# Altium PCB controller.PcbDoc
Units mil, origin at the board's own origin, x right, y up, seen from the top; angles counter-clockwise.
Board outline 1968.5 x 1968.5 mil, 2 copper layers (Top Layer, Bottom Layer); 13 components, 17 nets, 70 pads, 8 vias.
Unrouted connection lines stored in the file: 1.
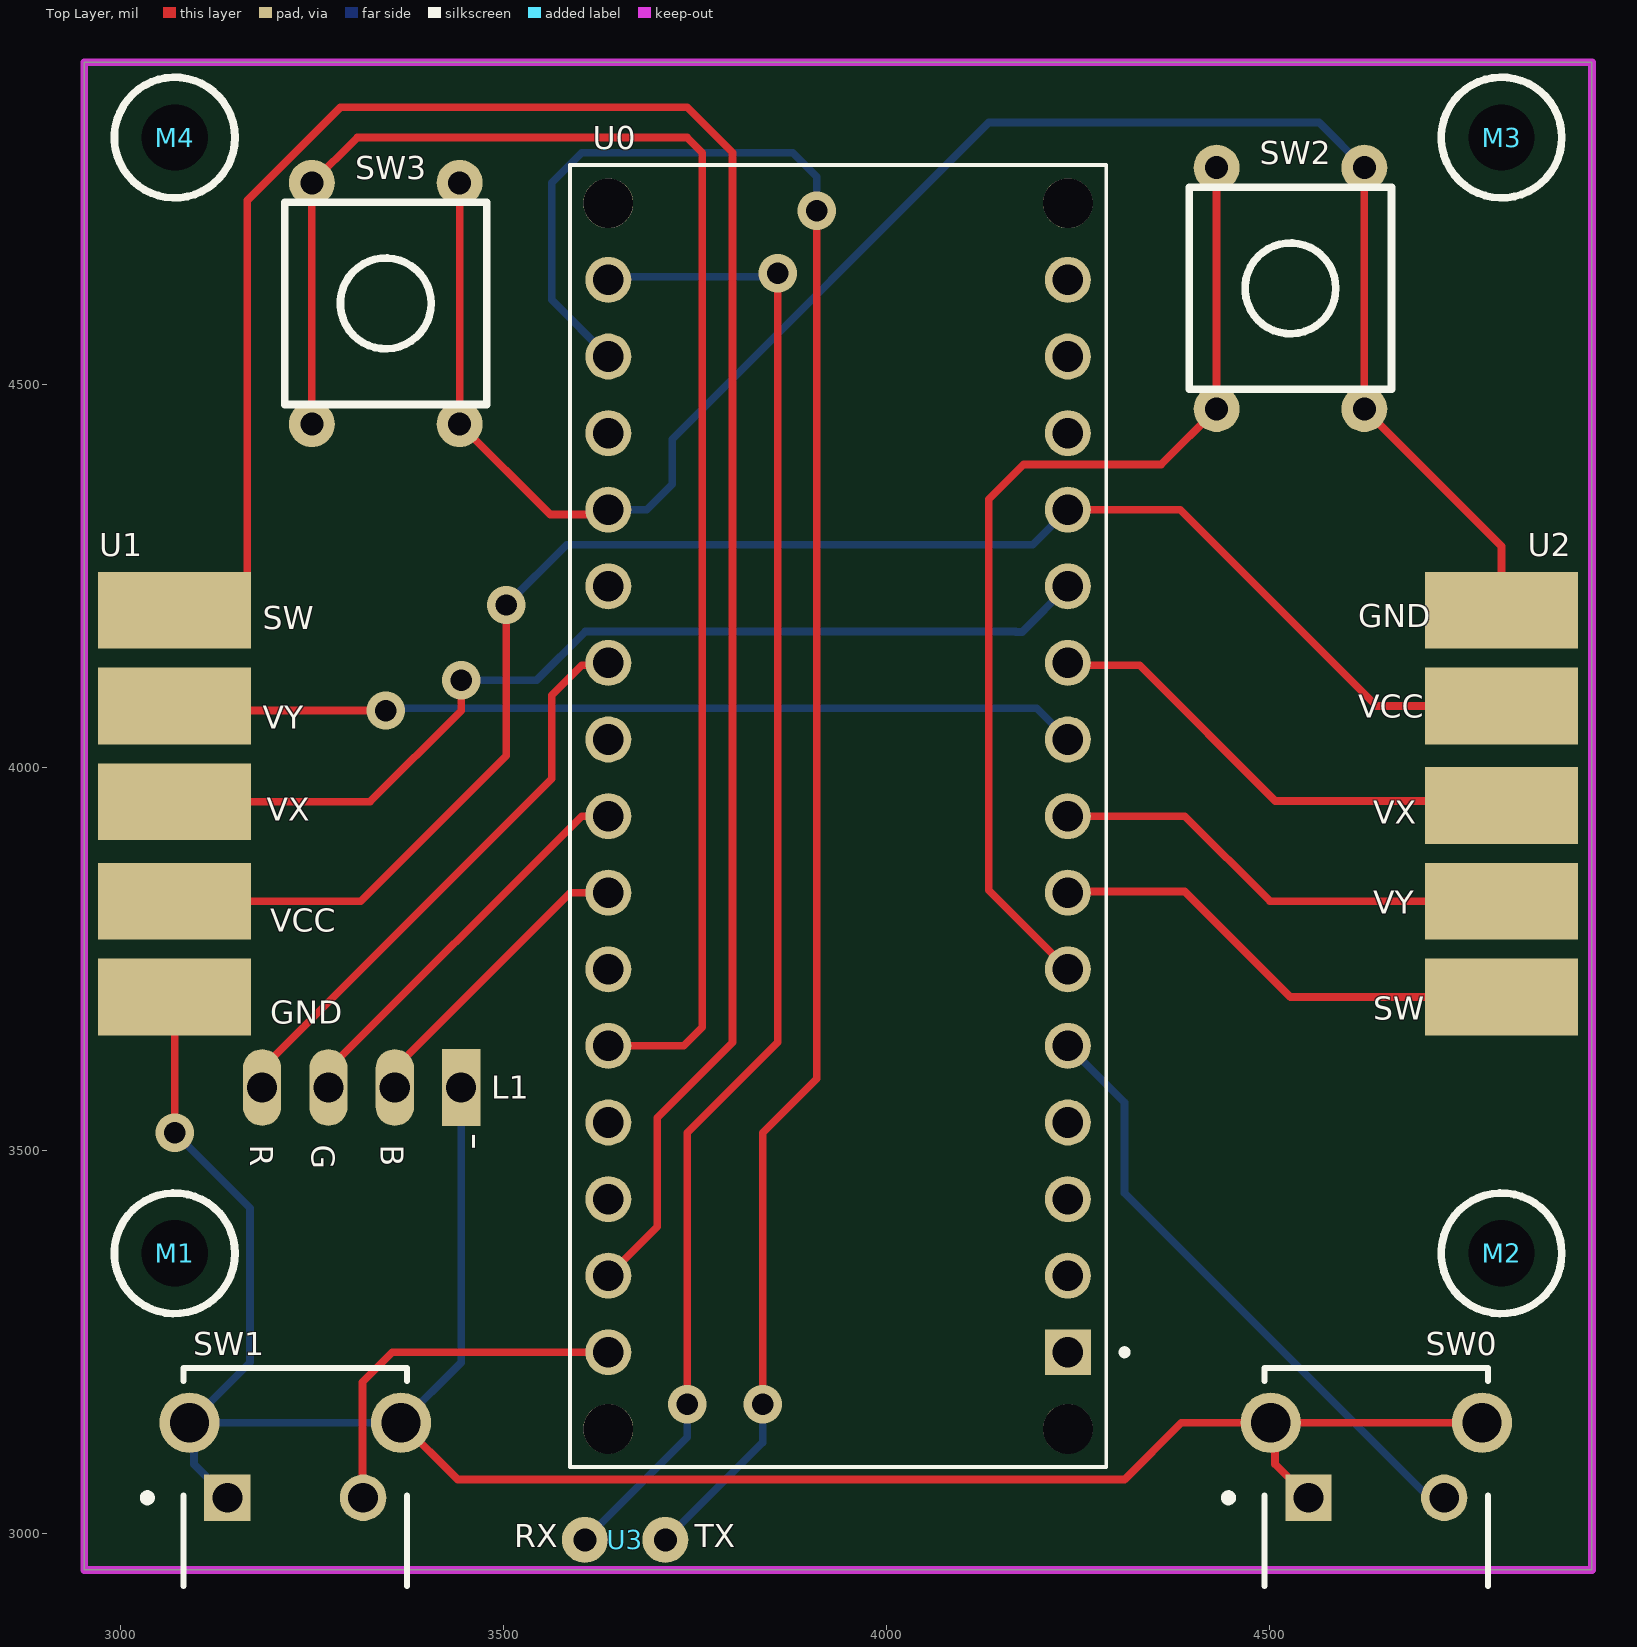
[diagram p0: Top Layer view]
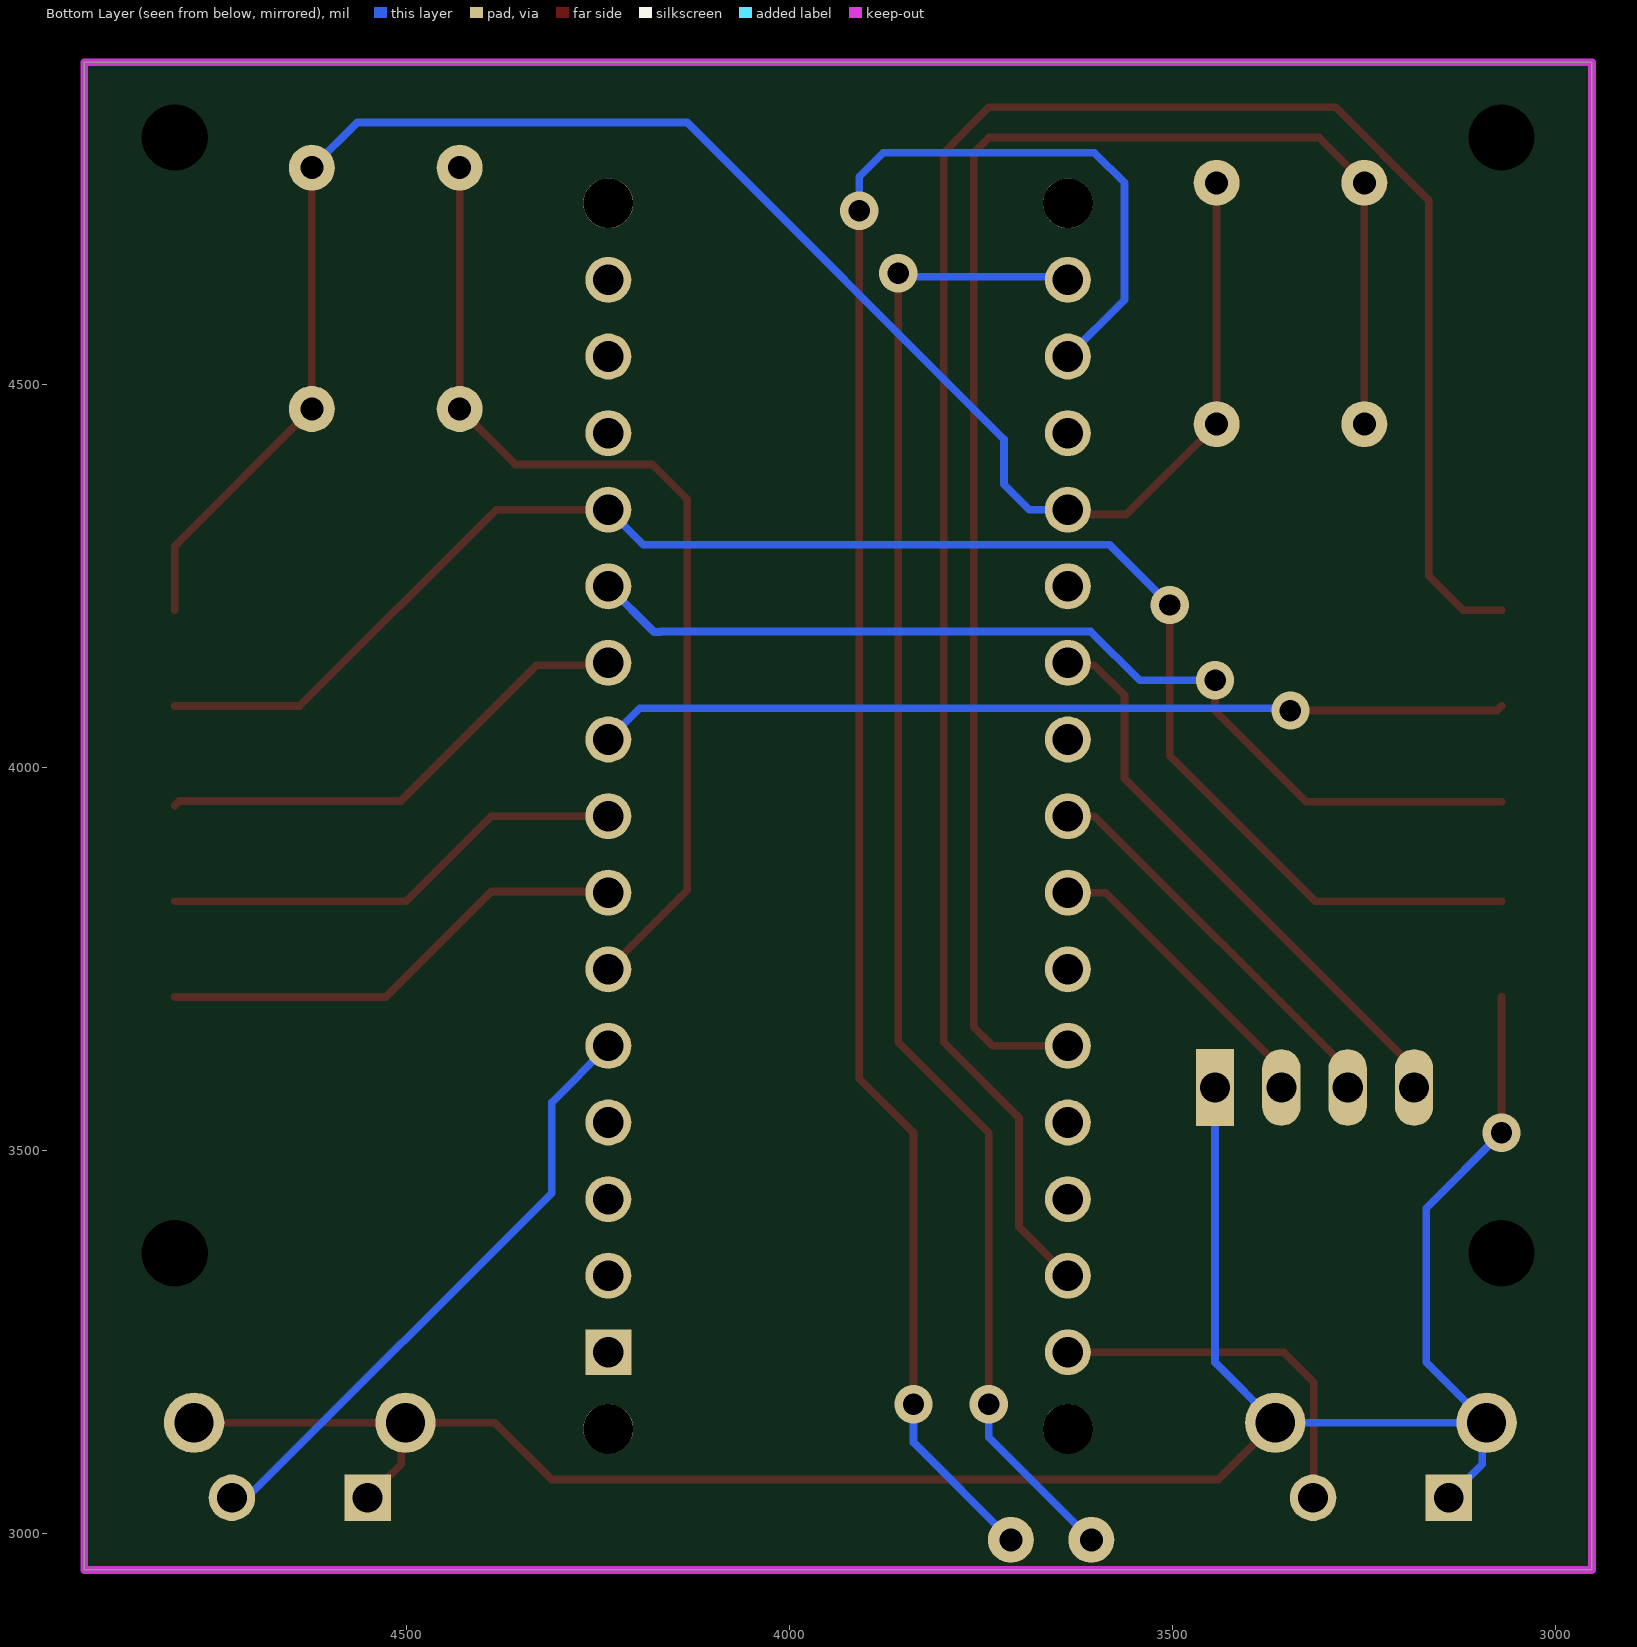
[diagram p1: Bottom Layer view, seen from below]

## Layer stack, top to bottom
Top Solder: solder mask 0.4, Solder Resist, Dk 3.5
Top Layer: signal copper 1.4
Dielectric 1: dielectric 12.6, FR-4, Dk 4.8
Bottom Layer: signal copper 1.4
Bottom Solder: solder mask 0.4, Solder Resist, Dk 3.5

## Board outline
2952.76,2952.76 2952.76,4921.26 4921.26,4921.26 4921.26,2952.76

## Design rules (kind name [scope] priority, off if disabled: settings)
Clearance Clearance_1 [All] p1: gap=5.91 ignorepadtopadclearanceinfootprint=FALSE
Clearance [All] p2: gap=10 ignorepadtopadclearanceinfootprint=FALSE ismatrix=TRUE
PolygonConnect [All] p1: connectstyle=Relief reliefconductorwidth=10 reliefentries=4 polygonreliefangle="90 Angle" airgapwidth=10
RoutingVias [All] p1: holewidth=28 width=50 viastyle="Through Hole" minholewidth=28 minwidth=50 maxholewidth=28 maxwidth=50
SolderMaskExpansion [All] p1: expansion=4 istentingtop=FALSE
Width [All] p1: maxlimit=10 minlimit=10 preferedwidth=10
30 further rules are at their usual default settings.

## Classes and differential pairs
component class controller: L1 M1 M2 M3 M4 SW0 SW1 SW2 U0 U1 U2 U3

## Components (designator, comment, footprint, x,y, rotation, side; value= is the part's Value field where it differs from the comment)
L1 "RGB_LED" RGB_LED 3444.88,3582.68 r270 top
M1 "mthnp2p2" mthnp2p2 3070.87,3366.14 r0 top
M2 "mthnp2p2" mthnp2p2 4803.15,3366.14 r0 top
M3 "mthnp2p2" mthnp2p2 4803.15,4822.84 r0 top
M4 "mthnp2p2" mthnp2p2 3070.87,4822.83 r0 top
SW0 "1825027-5" FP-1825027-5-0 4639.76,3050 r0 top
SW1 "1825027-5" FP-1825027-5-0 3228.35,3050 r0 top
SW2 "" DIP_BUTTON 4527.56,4625.98 r0 top
SW3 "" DIP_BUTTON 3346.46,4606.3 r0 top
U0 "ABX00028" MODULE_ABX00028 3937.01,3937.01 r90 top
U1 "joystick" joystick 2300.87,4000.79 r90 top
U2 "joystick" joystick 5573.15,3905.79 r270 top
U3 "" PCBComponent_1 3661.42,2992.13 r0 top

## Footprints (in the part's own frame and the unit in brackets; to place one, negate y for a bottom-side part, rotate by r counter-clockwise, add the part's x,y. Pads: shape width x height; smd on the part's side, far side on the other; paste and mask are expansions set on the pad)
DIP_BUTTON [mil]
  round 60 hole 30: 1(-96.46,-157.48) 1(-96.46,157.48) 2(96.46,-157.48) 2(96.46,157.48)
  silkscreen extent -132,-132 132,132
FP-1825027-5-0 [mm]
  rect 1.54x1.54 hole 0.99 paste-2539.97 mask+0: 1(-2.25,-0.075)
  round 1.54 hole 0.99 paste-2539.97 mask+0: 2(2.25,-0.075)
  round 2 hole 1.3 paste-2539.97 mask+0: 3(-3.505,2.415) 4(3.505,2.415)
  silkscreen extent -5.03,-3 3.71,4.23, body extent -4.2,-3.93 4.2,3.93, height 7.31
joystick [mil]
  rect 100x200 smd: 1(-300,-770) 2(-175,-770) 3(-45,-770) 4(80,-770) 5(205,-770)
MODULE_ABX00028 [mil]
  rect 60x60 / inner round 60 / far side rect 60x60 hole 40: 1(-700,-300)
  round 60 hole 40: 2(-600,-300) 3(-500,-300) 4(-400,-300) 5(-300,-300) 6(-200,-300) 7(-100,-300) 8(0,-300) 9(100,-300) 10(200,-300) 11(300,-300) 12(400,-300) 13(500,-300) 14(600,-300) 15(700,-300) 16(700,300) 17(600,300) 18(500,300) 19(400,300) 20(300,300) 21(200,300) 22(100,300) 23(0,300) 24(-100,300) 25(-200,300) 26(-300,300) 27(-400,300) 28(-500,300) 29(-600,300) 30(-700,300)
  round 65 hole 65 unplated: ""(-800,-300) ""(-800,300) ""(800,-300) ""(800,300)
  silkscreen extent -850,-378 850,350, body extent -895,-350 850,350, height 236
mthnp2p2 [mm]
  round 0 hole 2.2: 10(0,0)
  silkscreen extent -2,-2 2,2
PCBComponent_1 [mil]
  round 60 hole 30: 1(-55,0) 2(50,0)
RGB_LED [mm]
  oval 2.54x1.27 hole 1: 1(0,-6.6) 2(0,-4.4) 3(0,-2.2)
  rect 2.54x1.27 hole 1: 4(0,0)

## Part data
SW0 SW1: library part CMP-2000-05514-2, "SWITCH TACTILE SPST-NO 0.05A 24V", Contact Current Rating=50mA, Contact Resistance=100mΩ, Manufacturer="TE Connectivity", Operating Force=160gf, Temperature="-35°C to +85°C", Temperature Range High=+85°C, Temperature Range Low=-35°C, Voltage Rating Dc=24V, Automotive=No, Category=Switch, ComponentLink2Description=Datasheet, ComponentLink2URL=https://www.te.com/commerce/DocumentDelivery/DDEController?Action=showdoc&DocId=Customer+Drawing%7F1825027%7FG4%7Fpdf%7FEnglish%7FENG_CD_1825027_G4.pdf%7F1825027-5, Device Class L1=Electromechanical, Device Class L2=Switches, Device Class L3="Pushbutton Switches", Digikey Description="SWITCH TACTILE SPST-NO 0.05A 24V", Electromechanical Life=100000Cycles, Height=7.31mm, Lead Free=Yes, Manufacturer Part Number=1825027-5, Mount="Through Hole", Mouser Description="Tactile Switches R/A TACT 160G PB SWITCH", Octopart=https://octopart.com/1825027-5-te+connectivity-46510878, Package=1825027-5, RoHS=TRUE, Throw Configuration=SPST-NO
SW2 SW3: library part button
U0: "Arduinoâ€™s 5V compatible board in the smallest available form factor: 45x18mm!", Package=None, Availability="Not in stock", Check_prices=https://www.snapeda.com/parts/Arduino%20Nano%20Every/Arduino/view-part/?ref=eda, MF=Arduino, MP="Arduino Nano Every", Price=None, SnapEDA_Link=https://www.snapeda.com/parts/Arduino%20Nano%20Every/Arduino/view-part/?ref=snap
U3: library part U*

## Via types
v1: diameter 50, hole 28, Top Layer to Bottom Layer, 8 vias

## Nets (pads, with @x,y where several pads share a name; then routed paths per layer and width w, separated by ;. In a path a pad name is that pad's centre, name@x,y a point inside that pad or via, vN(x,y) a via of type N, cw(c..) or ccw(c..) an arc to the next point about the centre after c; other vN are vias at no path point)
B: L1.3 U0.24 | length 398.7
  Top Layer w10: L1.3 3358.27,3607.68 3587.6,3837.01 U0.24
G: L1.2 U0.23 | length 526
  Top Layer w10: L1.2 3271.65,3606.3 3602.36,3937.01 U0.23
GND: L1.4 SW0.1 SW0.3 SW0.4 SW1.1 SW1.3 SW1.4 SW2.2 SW3.2 U0.19 U1.1 U2.1 | length 5553.1
  Top Layer w10: v1(3070.87,3523.62) U1.1 ; SW1.4 3440.55,3070.87 4311.02,3070.87 4385.24,3145.08 SW0.3 ; SW3.2@3442.91,4763.78 3442.91,4448.82 3561.02,4330.71 3630.71,4330.71 U0.19 ; SW0.1 4507.52,3090.71 4507.52,3139.33 SW0.3 ; SW2.2@4624.02,4783.46 4624.02,4468.51 4803.15,4289.37 U2.1 ; SW0.4 SW0.3
  Bottom Layer w10: v1(3070.87,3523.62) 3169.29,3425.2 3169.29,3224.02 SW1.3 ; SW1.1 3096.1,3090.71 3096.1,3139.33 SW1.3 ; L1.4 3444.88,3223.62 SW1.4 SW1.3 ; U0.19 3687.4,4337.01 3720.47,4370.08 3720.47,4429.13 4133.86,4842.52 4564.96,4842.52 SW2.2@4624.02,4783.46
JS1: U0.29 U1.5 | length 2845
  Top Layer w10: U1.5 3120.87,4205.79 3165.87,4250.79 3165.87,4740.67 3287.4,4862.2 3740.16,4862.2 3799.21,4803.15 3799.21,3641.73 3700.79,3543.31 3700.79,3400.79 U0.29
JS2: U0.7 U2.5 | length 623.9
  Top Layer w10: U0.7 4238.58,3838.58 4389.76,3838.58 4527.56,3700.79 U2.5
R: L1.1 U0.21 | length 760
  Top Layer w10: L1.1 3185.04,3607.68 3562.99,3985.63 3562.99,4094.49 3602.36,4133.86 3633.86,4133.86 U0.21
RX: U0.17 U3.2 | length 2502.1
  Top Layer w10: v1(3838.58,3169.29) 3838.58,3523.62 3909.21,3594.25 v1(3909.21,4727.36)
  Bottom Layer w10: U0.17 3562.99,4611.02 3562.99,4763.78 3602.36,4803.15 3877.95,4803.15 3909.21,4771.89 v1(3909.21,4727.36) ; U3.2 3838.58,3119.29 v1(3838.58,3169.29) v1@3843.9,3163.98
SW0: SW0.2 U0.5 | length 804.9
  Bottom Layer w10: U0.5 4311.02,3562.99 4311.02,3444.88 4699.17,3056.74 4718.66,3056.74 SW0.2
SW1: SW1.2 U0.30 | length 488.4
  Top Layer w10: SW1.2 3316.06,3047.91 3316.06,3197.95 3355.12,3237.01 U0.30
SW2: SW2.1 U0.6 | length 1317.2
  Top Layer w10: U0.6 4133.86,3840.16 4133.86,4350.39 4179.57,4396.1 4358.7,4396.1 4431.1,4468.5 SW2.1@4431.1,4783.46
SW3: SW3.1 U0.26 | length 2132.1
  Top Layer w10: SW3.1@3250,4448.82 3250,4763.78 3309.05,4822.83 3740.16,4822.83 3759.84,4803.15 3759.84,3661.42 3735.43,3637.01 U0.26
TX: U0.16 U3.1 | length 1985.6
  Top Layer w10: v1(3740.16,3169.29) 3740.16,3523.62 3858.27,3641.73 v1(3858.27,4645.67)
  Bottom Layer w10: U3.1 3740.16,3125.87 v1(3740.16,3169.29) v1@3742.18,3167.26 ; U0.16 3641.34,4641.34 3853.94,4641.34 v1(3858.27,4645.67)
VCC: U0.12 U1.2 U2.2 | length 2165.5
  Top Layer w10: U1.2 3313.98,3825.79 3503.94,4015.75 v1(3503.94,4212.6) ; U0.12 4383.46,4337.01 4639.68,4080.79 U2.2
  Bottom Layer w10: v1(3503.94,4212.6) 3582.68,4291.34 4191.34,4291.34 U0.12
VX1: U0.11 U1.3 | length 1306.1
  Top Layer w10: U1.3 3325.87,3955.79 3444.88,4074.8 v1(3444.88,4114.17)
  Bottom Layer w10: v1(3444.88,4114.17) 3543.31,4114.17 3607.05,4177.91 4168.54,4177.91 4169.09,4177.37 4177.37,4177.37 U0.11
VX2: U0.10 U2.3 | length 643.3
  Top Layer w10: U0.10 4240.16,4133.86 4330.71,4133.86 4507.87,3956.69 4797.25,3956.69 U2.3
VY1: U0.9 U1.4 | length 1167.2
  Top Layer w10: U1.4 3076.85,4074.8 v1@3326.77,4074.8
  Bottom Layer w10: v1(3346.46,4074.8) 3349.57,4077.91 4196.1,4077.91 U0.9
VY2: U0.8 U2.4 | length 612.2
  Top Layer w10: U0.8 4389.76,3937.01 4500.98,3825.79 U2.4
pads on no net: M1.10 M2.10 M3.10 M4.10 U0. U0.1 U0.2 U0.3 U0.4 U0.13 U0.14 U0.15 U0.18 U0.20 U0.22 U0.25 U0.27 U0.28

## Keep-outs
Keep-Out Layer:
  the board outline again, w10

## Silkscreen, mask and mechanical layers (free items; w line width, h text height)
Top Overlay:
  text "RX" at 3513.94,2982.44 h30
  text "TX" at 3750.16,2982.44 h30

## Text inside footprints (layer, text, board x,y; h text height)
L1: Top Overlay "-" at 3429.53,3523.62 h80 r270; Top Overlay "B" at 3339.88,3507.68 h30 r270; Top Overlay "G" at 3249.88,3507.68 h30 r270; Top Overlay "R" at 3169.88,3507.68 h30 r270
U1: Top Overlay "GND" at 3195.86,3665.79 h30; Top Overlay "VCC" at 3195.86,3785.79 h30; Top Overlay "VX" at 3190.86,3930.79 h30; Top Overlay "VY" at 3185.86,4050.79 h30; Top Overlay "SW" at 3185.86,4180.79 h30
U2: Top Overlay "SW" at 4635.98,3671.42 h30; Top Overlay "VY" at 4635.98,3809.21 h30; Top Overlay "VX" at 4635.98,3927.32 h30; Top Overlay "VCC" at 4616.3,4065.12 h30; Top Overlay "GND" at 4616.3,4183.23 h30